# EAGLE board ENTRENADOR_SMD (EAGLE 9.6.2)
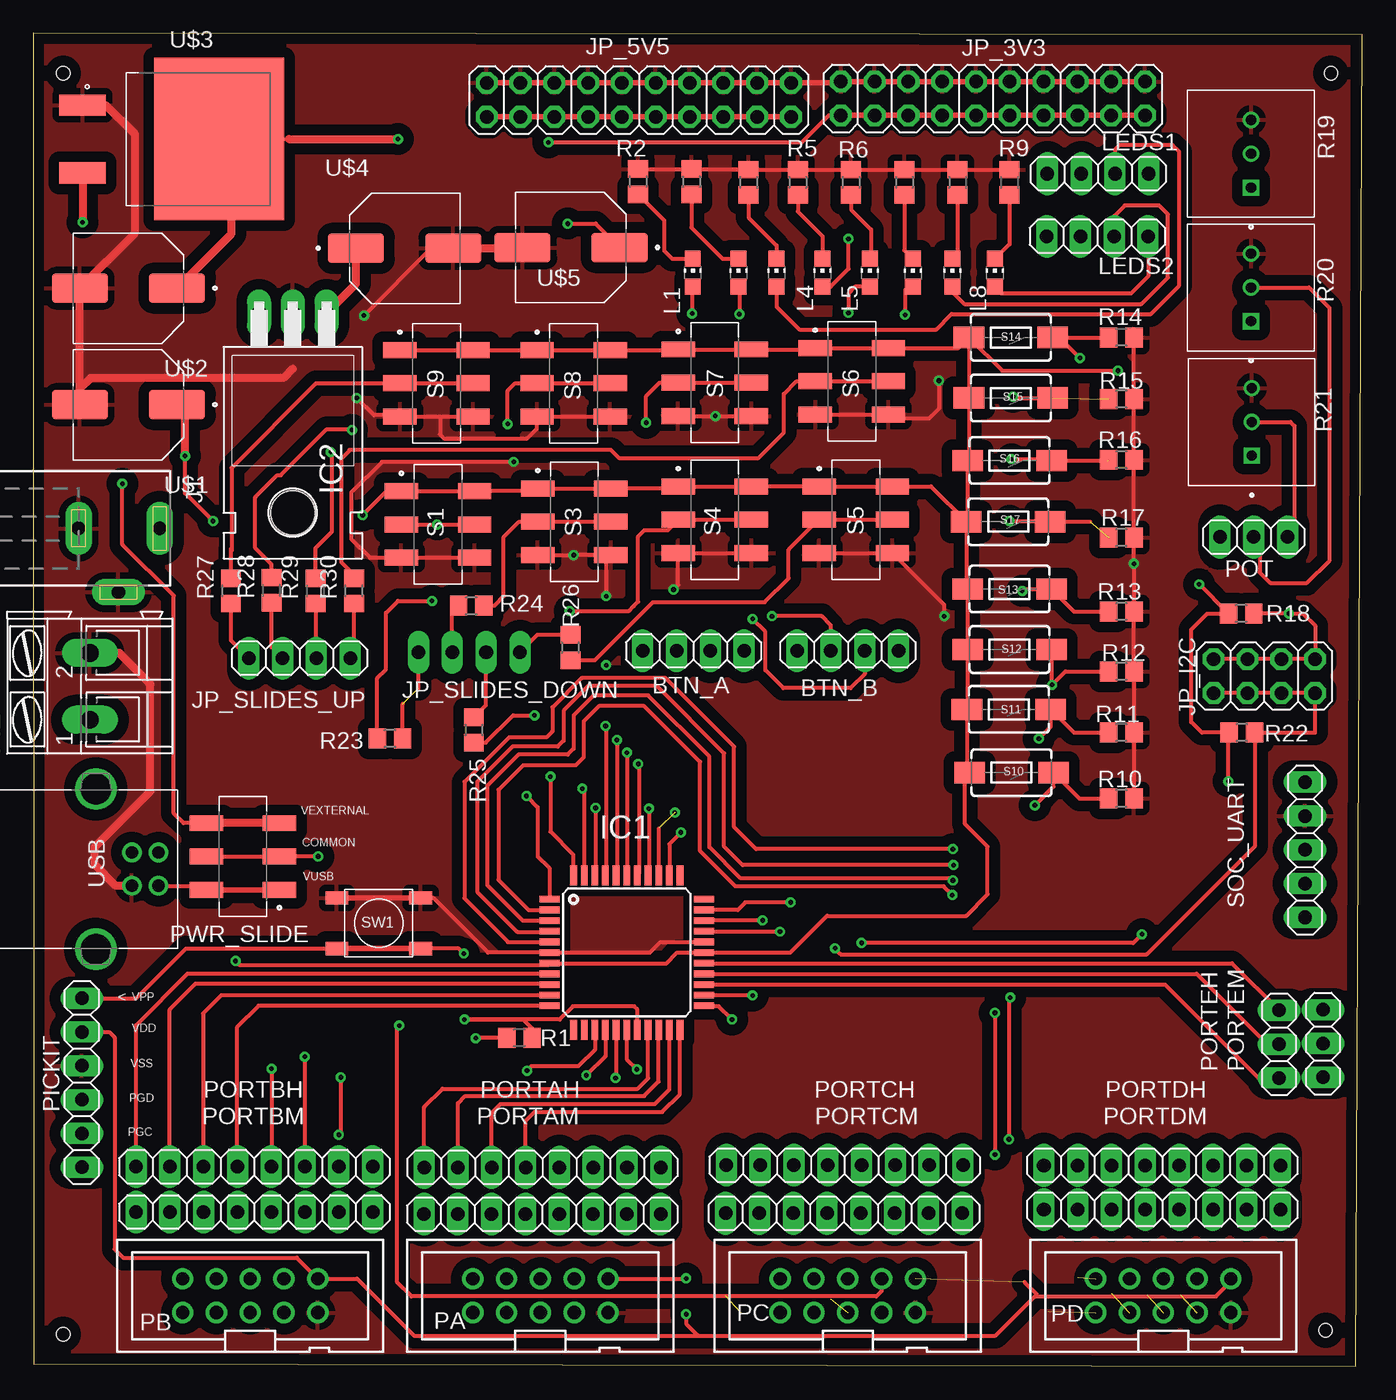
[diagram p0: board, top side]
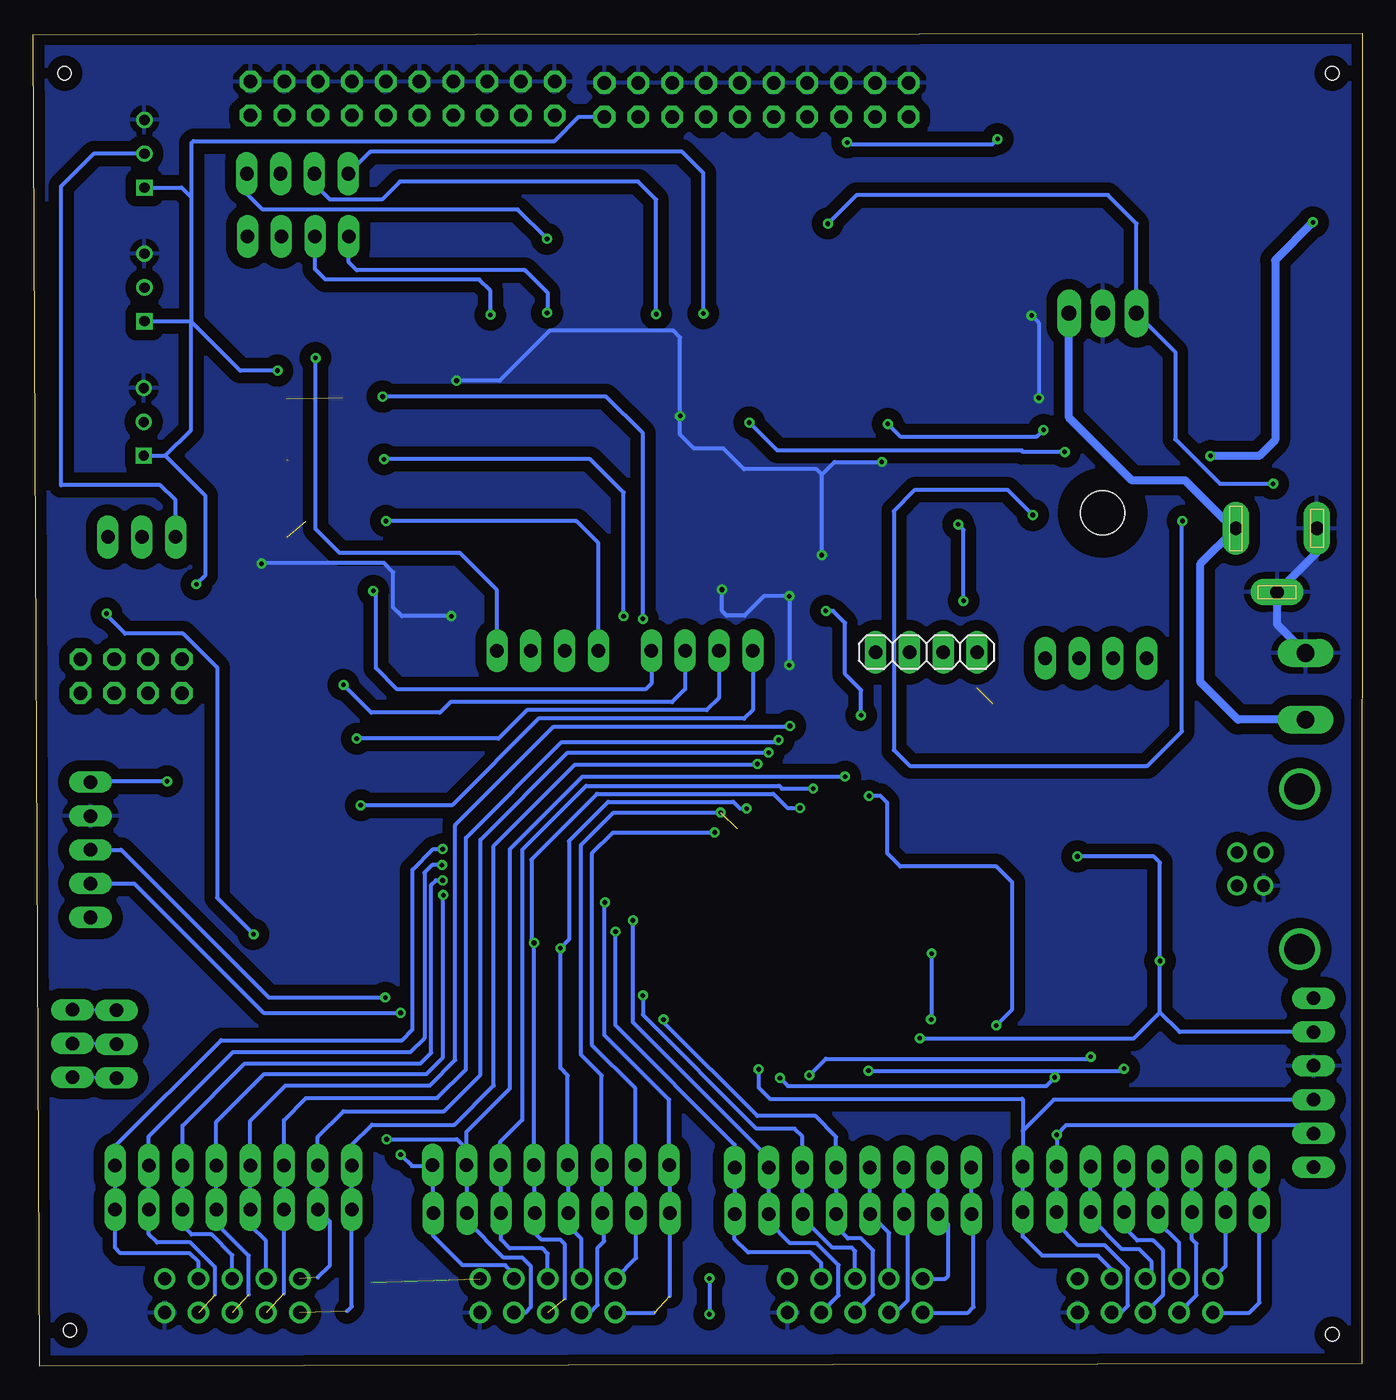
[diagram p1: board, bottom side, seen from below]

Size 99.85 x 100.15 mm. Coordinates in mm from the lower left corner, seen from the top.
Outline: 0.05,0.2 99.35,0 99.85,100.05 0,100.15 0.05,0.2
Copper layers (1*16): Top 0.035mm / dielectric 1.5mm / Bottom 0.035mm
Design rules "China_JLCPCB *": minimum track width 0.25mm, minimum drill 0.4mm, track to track 0.24mm, track to pad 0.23mm, pad to pad 0.2mm, via to via 0.25mm, smd to smd 0.2mm, copper to edge 0.5mm, drill to drill 0.3mm, minimum pad ring 0.149mm, minimum via ring 0.2mm, stop-mask expansion 3mil, vias tented up to drill 0.6mm, thermal gap 20mil
Holes 1 mm at 2.25,2.4 97.1,2.7 97.5,97.15 2.25,97.15

## Footprints (pad centres in the part's own frame; a part is rotated, then mirrored left to right if it is on the bottom)
1X04 = drill 1.016 long: 1 -3.81,0; 2 -1.27,0; 3 1.27,0; 4 3.81,0
TQFP44 = smd 1.5 x 0.5: 1 -5.8,4; 2 -5.8,3.2; 3 -5.8,2.4; 4 -5.8,1.6; 5 -5.8,0.8; 6 -5.8,0; 7 -5.8,-0.8; 8 -5.8,-1.6; 9 -5.8,-2.4; 10 -5.8,-3.2; 11 -5.8,-4; 23 5.8,-4; 24 5.8,-3.2; 25 5.8,-2.4; 26 5.8,-1.6; 27 5.8,-0.8; 28 5.8,0; 29 5.8,0.8; 30 5.8,1.6; 31 5.8,2.4; 32 5.8,3.2; 33 5.8,4 | smd 0.5 x 1.5: 12 -4,-5.8; 13 -3.2,-5.8; 14 -2.4,-5.8; 15 -1.6,-5.8; 16 -0.8,-5.8; 17 0,-5.8; 18 0.8,-5.8; 19 1.6,-5.8; 20 2.4,-5.8; 21 3.2,-5.8; 22 4,-5.8; 34 4,5.8; 35 3.2,5.8; 36 2.4,5.8; 37 1.6,5.8; 38 0.8,5.8; 39 0,5.8; 40 -0.8,5.8; 41 -1.6,5.8; 42 -2.4,5.8; 43 -3.2,5.8; 44 -4,5.8
TO220H = drill 1.118 long: 1 -2.54,-10.16; 2 0,-10.16; 3 2.54,-10.16 | hole 3.302: 0,4.826
DCJ0202 = drill 1 pad 2 long: 1 0,3.1; 2 4.8,0; 3 0,-3
2X10 = drill 1.016 octagon: 1 -11.43,-1.27; 2 -11.43,1.27; 3 -8.89,-1.27; 4 -8.89,1.27; 5 -6.35,-1.27; 6 -6.35,1.27; 7 -3.81,-1.27; 8 -3.81,1.27; 9 -1.27,-1.27; 10 -1.27,1.27; 11 1.27,-1.27; 12 1.27,1.27; 13 3.81,-1.27; 14 3.81,1.27; 15 6.35,-1.27; 16 6.35,1.27; 17 8.89,-1.27; 18 8.89,1.27; 19 11.43,-1.27; 20 11.43,1.27
2X04 = drill 1.016 octagon: 1 -3.81,-1.27; 2 -3.81,1.27; 3 -1.27,-1.27; 4 -1.27,1.27; 5 1.27,-1.27; 6 1.27,1.27; 7 3.81,-1.27; 8 3.81,1.27
CHIP-LED0805 = smd 1.2 x 1.2: A 0,-1.05; C 0,1.05
PAK100/2500-10 = drill 1 pad 1.422: 1 -5.08,-1.27; 2 -5.08,1.27; 3 -2.54,-1.27; 4 -2.54,1.27; 5 0,-1.27; 6 0,1.27; 7 2.54,-1.27; 8 2.54,1.27; 9 5.08,-1.27; 10 5.08,1.27
1X06 = drill 1.016 long: 1 -6.35,0; 2 -3.81,0; 3 -1.27,0; 4 1.27,0; 5 3.81,0; 6 6.35,0
1X08 = drill 1.016 long: 1 -8.89,0; 2 -6.35,0; 3 -3.81,0; 4 -1.27,0; 5 1.27,0; 6 3.81,0; 7 6.35,0; 8 8.89,0
1X03 = drill 1.016 long: 1 -2.54,0; 2 0,0; 3 2.54,0
SW_JS202011SCQN = smd 1.2 x 2.5: 1 -2.5,-2.75; 2 0,-2.75; 3 2.5,-2.75; 4 -2.5,2.75; 5 0,2.75; 6 2.5,2.75
R0805 = smd 1.3 x 1.5: 1 -0.95,0; 2 0.95,0
TRIM_COM-09806 = drill 0.76 square: 1 -2.54,0 | drill 0.76: 2 0,0; 3 2.54,0
TACTILE_SWITCH_SMD_6.0X3.5MM = smd 2.3 x 1.6: 1 -3.15,0; 2 3.15,0
1X05 = drill 1.016 long: 1 -5.08,0; 2 -2.54,0; 3 0,0; 4 2.54,0; 5 5.08,0
SW_TL3342F160QG/TR = smd 1.7 x 1: 1 -3.15,-1.9; 2 3.15,-1.9; 3 -3.15,1.9; 4 3.15,1.9
CAPA = smd 4.2 x 2.2: N 3.65,0; P -3.65,0
VREG3V3 = smd 3.5 x 1.6: 1 -6.7,2.54; 3 -6.7,-2.54 | smd 9.75 x 12.2: 4 3.575,0
85-32004-10X = drill 0.92 pad 1.27: 1 4.71,-1.25; 2 4.71,1.25; 3 2.71,1.25; 4 2.71,-1.25 | drill 2.3 pad 3: M1 0,6.02; M2 0,-6.02
AK300/2 = drill 1.321 long: 1 -2.515,0; 2 2.489,0

## Placement (x,y rotation side)
BTN_A  [1X04]  49.6,53.75 0 top
BTN_B  [1X04]  61.2,53.75 0 top
IC1  PIC16F1939PT  [TQFP44]  44.59,31.08 0 top
IC2  7824T  [TO220H]  19.5,68.95 180 top
J1  DCJ0202  [DCJ0202]  6.4,62.95 270 top
JP_3V3  [2X10]  72.1,95.25 0 top
JP_5V5  [2X10]  45.5,95.15 0 top
JP_I2C  [2X04]  92.5,51.85 180 top
JP_SLIDES_DOWN  [1X04]  32.75,53.65 0 bottom
JP_SLIDES_UP  [1X04]  20,53.2 0 top
L1  [CHIP-LED0805]  49.55,82.15 0 top
L4  [CHIP-LED0805]  59.3,82.15 0 top
L5  [CHIP-LED0805]  62.85,82.15 0 top
L8  [CHIP-LED0805]  72.25,82.15 0 top
LED2  [CHIP-LED0805]  53,82.15 0 top
LED3  [CHIP-LED0805]  55.85,82.15 0 top
LED6  [CHIP-LED0805]  66.1,82.15 0 top
LED7  [CHIP-LED0805]  69.05,82.15 0 top
LEDS1  [1X04]  80,89.6 0 top
LEDS2  [1X04]  79.95,84.9 0 top
PA  2510-  [PAK100/2500-10]  38.1,5.3 0 top
PB  2510-  [PAK100/2500-10]  16.3,5.3 0 top
PC  2510-  [PAK100/2500-10]  61.2,5.3 0 top
PD  2510-  [PAK100/2500-10]  84.9,5.3 0 top
PICKIT  [1X06]  3.65,21.3 270 top
PORTAH  [1X08]  38.26,14.94 0 top
PORTAM  [1X08]  38.24,11.42 0 top
PORTBH  [1X08]  16.61,14.99 0 top
PORTBM  [1X08]  16.61,11.58 0 top
PORTCH  [1X08]  60.96,15.1 0 top
PORTCM  [1X08]  60.91,11.49 0 top
PORTDH  [1X08]  84.82,15.09 0 top
PORTDM  [1X08]  84.82,11.78 0 top
PORTEH  [1X03]  93.6,24.2 90 top
PORTEM  [1X03]  96.9,24.25 90 top
POT  [1X03]  91.7,62.3 0 top
PWR_SLIDE  SLDS2  [SW_JS202011SCQN]  15.75,38.3 90 top
R1  4K7  [R0805]  36.52,24.67 180 top
R2  330R  [R0805]  45.45,89 270 top
R3  330R  [R0805]  49.45,89 270 top
R4  330R  [R0805]  53.75,88.95 270 top
R5  330R  [R0805]  57.45,88.95 270 top
R6  330R  [R0805]  61.45,88.95 270 top
R7  330R  [R0805]  65.45,88.95 270 top
R8  330R  [R0805]  69.45,88.95 270 top
R9  330R  [R0805]  73.35,88.95 270 top
R10  10K  [R0805]  81.75,42.65 180 top
R11  10K  [R0805]  81.75,47.6 180 top
R12  10K  [R0805]  81.75,52.2 180 top
R13  10K  [R0805]  81.75,56.7 180 top
R14  10K  [R0805]  81.75,77.3 180 top
R15  10K  [R0805]  81.75,72.65 180 top
R16  10K  [R0805]  81.75,68.1 180 top
R17  10K  [R0805]  81.75,62.25 180 top
R18  [R0805]  90.75,56.55 180 top
R19  COM-09806  [TRIM_COM-09806]  91.5,91.1 90 top
R20  COM-09806  [TRIM_COM-09806]  91.5,81.05 90 top
R21  COM-09806  [TRIM_COM-09806]  91.55,70.95 90 top
R22  [R0805]  90.8,47.6 180 top
R23  4K7  [R0805]  26.8,47.15 180 top
R24  4K7  [R0805]  32.9,57.15 0 top
R25  4K7  [R0805]  33.1,47.8 270 top
R26  4K7  [R0805]  40.35,54 270 top
R27  4K7  [R0805]  14.85,58.25 90 top
R28  4K7  [R0805]  17.9,58.3 90 top
R29  4K7  [R0805]  21.2,58.25 90 top
R30  4K7  [R0805]  24.1,58.25 90 top
S1  SLDS2  [SW_JS202011SCQN]  30.4,63.25 270 top
S3  SLDS2  [SW_JS202011SCQN]  40.65,63.45 270 top
S4  SLDS2  [SW_JS202011SCQN]  51.2,63.6 270 top
S5  SLDS2  [SW_JS202011SCQN]  61.8,63.6 270 top
S6  SLDS2  [SW_JS202011SCQN]  61.5,74 270 top
S7  SLDS2  [SW_JS202011SCQN]  51.2,73.9 270 top
S8  SLDS2  [SW_JS202011SCQN]  40.6,73.85 270 top
S9  SLDS2  [SW_JS202011SCQN]  30.3,73.85 270 top
S10  BTN1  [TACTILE_SWITCH_SMD_6.0X3.5MM]  73.5,44.6 180 top
S11  BTN1  [TACTILE_SWITCH_SMD_6.0X3.5MM]  73.3,49.35 180 top
S12  BTN1  [TACTILE_SWITCH_SMD_6.0X3.5MM]  73.35,53.85 180 top
S13  BTN1  [TACTILE_SWITCH_SMD_6.0X3.5MM]  73.35,58.4 180 top
S14  BTN1  [TACTILE_SWITCH_SMD_6.0X3.5MM]  73.45,77.3 180 top
S15  BTN1  [TACTILE_SWITCH_SMD_6.0X3.5MM]  73.45,72.75 180 top
S16  BTN1  [TACTILE_SWITCH_SMD_6.0X3.5MM]  73.35,68.05 180 top
S17  BTN1  [TACTILE_SWITCH_SMD_6.0X3.5MM]  73.25,63.45 180 top
SOC_UART  [1X05]  95.55,38.8 90 top
SW1  TL3342F160QG/TR  [SW_TL3342F160QG/TR]  25.95,33.28 180 top
U$1  CAPA  [CAPA]  7.15,72.25 180 top
U$2  CAPA  [CAPA]  7.15,81 180 top
U$3  VREG3V3  [VREG3V3]  10.4,92.2 0 top
U$4  CAPA  [CAPA]  27.9,84 0 top
U$5  CAPA  [CAPA]  40.4,84.05 180 top
USB  USB_B  [85-32004-10X]  4.7,37.35 0 top
X1  [AK300/2]  4.25,51.1 90 top

## Library data of the parts
BTN_A BTN_B JP_3V3 JP_5V5 JP_I2C JP_SLIDES_DOWN JP_SLIDES_UP LEDS1 LEDS2 PICKIT PORTAH PORTAM PORTBH PORTBM PORTCH PORTCM PORTDH PORTDM PORTEH PORTEM POT SOC_UART = pinhead
IC1 = microchip; MPN: PIC16F1939-I/PT; OC_FARNELL: 1755834; OC_NEWARK: 08R1959
IC2 = linear
J1 = con-jack; OC_FARNELL: unknown; OC_NEWARK: unknown
L1 L4 L5 L8 LED2 LED3 LED6 LED7 = led
PA PB PC PD = con-3m; MF: 3M; MPN: 2510-6002UB; OC_FARNELL: 9838244; OC_NEWARK: 46F4725
PWR_SLIDE S1 S3-S9 = JS202011SCQN; AVAILABILITY: In Stock; DESCRIPTION: Slide Switch DPDT Surface Mount; MF: C&K; MP: JS202011SCQN; PACKAGE: None; PRICE: None; PURCHASE-URL: https://pricing.snapeda.com/search?q=JS202011SCQN&ref=eda
R1-R18 R22-R30 = R0805_; SPICEPREFIX: R
R19-R21 = COM-09806; AVAILABILITY: In Stock; DESCRIPTION: 10 kOhms 0.5W, 1/2W PC Pins Through Hole Trimmer Potentiometer Cermet 1.0 Turn Top Adjustment; MF: SparkFun Electronics; MP: COM-09806; PACKAGE: DIP-3 SparkFun Electronics; PRICE: None; PURCHASE-URL: https://pricing.snapeda.com/search?q=COM-09806&ref=eda
S10-S17 = PTS636SM25FSMTRLFS; AVAILABILITY: In Stock; DESCRIPTION: Switch Tactile N.O. SPST Rectangular Button F-Lead 0.05A 12VDC 1.77N SMD T/R; MF: CK; MP: PTS636SM25FSMTRLFS; PACKAGE: None; PRICE: None
SW1 = TL3342F160QG_TR; AVAILABILITY: In Stock; DESCRIPTION: Tactile Switch SPST-NO Top Actuated Surface Mount; MF: E-Switch; MP: TL3342F160QG/TR; PACKAGE: None; PRICE: None; PURCHASE-URL: https://pricing.snapeda.com/search?q=TL3342F160QG/TR&ref=eda
U$1 U$2 U$4 U$5 = CAPAE830X1000N
U$3 = VREG_L7805ACD2T
USB = con-cypressindustries; OC_FARNELL: unknown; OC_NEWARK: unknown
X1 = con-ptr500; OC_FARNELL: unknown; OC_NEWARK: unknown

## Nets
3V3: JP_3V3.1 JP_3V3.3 JP_3V3.5 JP_3V3.7 JP_3V3.9 JP_3V3.11 JP_3V3.13 JP_3V3.15 JP_3V3.17 JP_3V3.19 U$2.P U$3.4
GND: IC1.6 IC1.29 IC2.2 J1.2 J1.3 JP_3V3.2 JP_3V3.4 JP_3V3.6 JP_3V3.8 JP_3V3.10 JP_3V3.12 JP_3V3.14 JP_3V3.16 JP_3V3.18 JP_3V3.20 JP_5V5.2 JP_5V5.4 JP_5V5.6 JP_5V5.8 JP_5V5.10 JP_5V5.12 JP_5V5.14 JP_5V5.16 JP_5V5.18 JP_5V5.20 PA.9 PB.9 PC.9 PD.9 PICKIT.3 R2.1 R3.1 R4.1 R5.1 R6.1 R7.1 R8.1 R9.1 R10.1 R11.1 R12.1 R13.1 R14.1 R15.1 R16.1 R17.1 R19.3 R20.3 R21.3 S1.3 S1.6 S3.3 S3.6 S4.3 S4.6 S5.3 S5.6 S6.3 S6.6 S7.3 S7.6 S8.3 S8.6 S9.3 S9.6 SOC_UART.4 SW1.1 SW1.2 U$1.N U$2.N U$3.1 U$4.N U$5.N USB.4 X1.2
LVP: PICKIT.6
MCLR: IC1.18 PICKIT.1 R1.1 SW1.3 SW1.4
N$1: R23.2 S1.2 S1.5
N$2: R24.2 S3.2 S3.5
N$3: R25.2 S4.2 S4.5
N$4: R26.2 S5.2 S5.5
N$5: R30.2 S6.2 S6.5
N$6: R29.2 S7.2 S7.5
N$7: R28.2 S8.2 S8.5
N$8: R27.2 S9.2 S9.5
N$9: L1.C R2.2
N$10: LED2.C R3.2
N$11: LED3.C R4.2
N$12: L4.C R5.2
N$13: L5.C R6.2
N$14: LED6.C R7.2
N$15: LED7.C R8.2
N$16: L8.C R9.2
N$17: L1.A LEDS1.1
N$18: LED2.A LEDS1.2
N$19: LED3.A LEDS1.3
N$20: L4.A LEDS1.4
N$21: L5.A LEDS2.1
N$22: LED6.A LEDS2.2
N$23: LED7.A LEDS2.3
N$24: L8.A LEDS2.4
N$25: BTN_A.1 R10.2 S10.1
N$26: BTN_A.2 R11.2 S11.1
N$27: BTN_A.3 R12.2 S12.1
N$28: BTN_A.4 R13.2 S13.1
N$29: BTN_B.4 R14.2 S14.1
N$30: BTN_B.3 R15.2 S15.1
N$31: BTN_B.2 R16.2 S16.1
N$32: BTN_B.1 R17.2 S17.1
N$33: POT.3 R21.2
N$34: POT.2 R20.2
N$35: POT.1 R19.2
N$36: IC2.1 J1.1 U$4.P X1.1
N$37: JP_SLIDES_UP.1 R27.1
N$38: JP_SLIDES_UP.2 R28.1
N$39: JP_SLIDES_UP.3 R29.1
N$40: JP_SLIDES_DOWN.1 R26.1
N$41: JP_SLIDES_DOWN.2 R25.1
N$42: JP_SLIDES_DOWN.3 R24.1
N$43: JP_SLIDES_DOWN.4 R23.1
N$44: JP_SLIDES_UP.4 R30.1
RA0: IC1.19 PA.1 PORTAH.1 PORTAM.1
RA1: IC1.20 PA.2 PORTAH.2 PORTAM.2
RA2: IC1.21 PA.3 PORTAH.3 PORTAM.3
RA3: IC1.22 PA.4 PORTAH.4 PORTAM.4
RA4: IC1.23 PA.5 PORTAH.5 PORTAM.5
RA5: IC1.24 PA.6 PORTAH.6 PORTAM.6
RA6: IC1.31 PA.7 PORTAH.7 PORTAM.7
RA7: IC1.30 PA.8 PORTAH.8 PORTAM.8
RB0: IC1.8 PB.1 PORTBH.1 PORTBM.1
RB1: IC1.9 PB.2 PORTBH.2 PORTBM.2
RB2: IC1.10 PB.3 PORTBH.3 PORTBM.3
RB3: IC1.11 PB.4 PORTBH.4 PORTBM.4
RB4: IC1.14 PB.5 PORTBH.5 PORTBM.5
RB5: IC1.15 PB.6 PORTBH.6 PORTBM.6
RB6: IC1.16 PB.7 PICKIT.5 PORTBH.7 PORTBM.7
RB7: IC1.17 PB.8 PICKIT.4 PORTBH.8 PORTBM.8
RC0: IC1.32 PC.1 PORTCH.1 PORTCM.1
RC1: IC1.35 PC.2 PORTCH.2 PORTCM.2
RC2: IC1.36 PC.3 PORTCH.3 PORTCM.3
RC3: IC1.37 JP_I2C.2 JP_I2C.4 JP_I2C.6 JP_I2C.8 PC.4 PORTCH.4 PORTCM.4 R22.1
RC4: IC1.42 JP_I2C.1 JP_I2C.3 JP_I2C.5 JP_I2C.7 PC.5 PORTCH.5 PORTCM.5 R18.1
RC5: IC1.43 PC.6 PORTCH.6 PORTCM.6
RC6: IC1.44 PC.7 PORTCH.7 PORTCM.7 SOC_UART.3
RC7: IC1.1 PC.8 PORTCH.8 PORTCM.8 SOC_UART.2
RD0: IC1.38 PD.1 PORTDH.1 PORTDM.1
RD1: IC1.39 PD.2 PORTDH.2 PORTDM.2
RD2: IC1.40 PD.3 PORTDH.3 PORTDM.3
RD3: IC1.41 PD.4 PORTDH.4 PORTDM.4
RD4: IC1.2 PD.5 PORTDH.5 PORTDM.5
RD5: IC1.3 PD.6 PORTDH.6 PORTDM.6
RD6: IC1.4 PD.7 PORTDH.7 PORTDM.7
RD7: IC1.5 PD.8 PORTDH.8 PORTDM.8
RE0: IC1.25 PORTEH.1 PORTEM.1
RE1: IC1.26 PORTEH.2 PORTEM.2
RE2: IC1.27 PORTEH.3 PORTEM.3
RST: SOC_UART.1
VCC: IC1.7 IC1.28 JP_5V5.1 JP_5V5.3 JP_5V5.5 JP_5V5.7 JP_5V5.9 JP_5V5.11 JP_5V5.13 JP_5V5.15 JP_5V5.17 JP_5V5.19 PA.10 PB.10 PC.10 PD.10 PICKIT.2 PWR_SLIDE.2 PWR_SLIDE.5 R1.2 R18.2 R19.1 R20.1 R21.1 R22.2 S1.1 S1.4 S3.1 S3.4 S4.1 S4.4 S5.1 S5.4 S6.1 S6.4 S7.1 S7.4 S8.1 S8.4 S9.1 S9.4 S10.2 S11.2 S12.2 S13.2 S14.2 S15.2 S16.2 S17.2 SOC_UART.5 U$1.P U$3.3
VEXT: IC2.3 PWR_SLIDE.3 PWR_SLIDE.6 U$5.P
VUSB: PWR_SLIDE.1 PWR_SLIDE.4 USB.1

## Tracks (layer width: path | path; a pad name or v marks a point on that pad's centre or on a via)
3V3  (via drill 0.35)
  Top 0.254: 15.8,92.2 19.2,92.2 | 15.9,92.1 15.8,92.2 | 15.8,92.2 U$3.4
  Top 0.3: v38.7,91.95 57.75,91.95 59.78,93.98 JP_3V3.1
  Top 0.406: JP_3V3.1 JP_3V3.3 | 63.6,93.98 JP_3V3.3 | JP_3V3.3 JP_3V3.5 JP_3V3.7 JP_3V3.9 JP_3V3.11 JP_3V3.13 JP_3V3.15 JP_3V3.17 JP_3V3.19
  Top 0.61: U$2.P 14.9,85.1 14.9,91.1 15.9,92.1 | 19.2,92.2 v27.4,92.2
  Bottom 0.3: v27.4,92.2 27.8,91.8 38.55,91.8 v38.7,91.95
GND  (via drill 0.35)
  Top 0.3: IC1.29 47.13,31.88 46.33,31.08 IC1.6 34.17,31.08 30.07,35.18 SW1.1 | R2.1 R3.1 53.7,89.95 R4.1 R5.1 R6.1 R7.1 R8.1 R9.1 | v24.3,72.75 25.6,71.45 27.45,71.45 S9.3 30.55,71.35 | v24.85,78.95 29.9,84 U$4.N | S1.6 S1.3 25.3,60.75 23.9,62.15 23.9,65.65 26.2,67.95 v36.1,67.95 | S5.3 S5.6 68.45,57.2 v68.45,56.35 | 30.55,71.35 S9.6 | 30.55,71.35 30.55,70 30.85,69.7 37.1,69.7 37.85,70.45 S8.3 S8.6 | S7.3 v51.25,71.4 S7.6 | S6.3 S6.6 64.55,71.2 67.3,71.2 68.05,71.95 v68.05,74.05 | S3.6 43.65,60.95 | 53.95,61.2 S4.6 S4.3 | R14.1 R15.1 R16.1 R17.1 v82.7,60.3 R13.1 R12.1 R11.1 R10.1 | 37.9,60.75 S3.3 v40.6,60.95 S3.6 | S3.6 43.05,60.6 v43.05,57.85 | S4.3 47.6,61.1 | v48.1,58.35 48.45,58.7 S4.3
  Top 0.406: SW1.1 SW1.2 | JP_3V3.20 JP_3V3.18 JP_3V3.16 JP_3V3.14 JP_3V3.12 JP_3V3.10 JP_3V3.8 JP_3V3.6 JP_3V3.4 JP_3V3.2 60.57,96.42 JP_5V5.20 JP_5V5.18 JP_5V5.16 JP_5V5.14 JP_5V5.12 JP_5V5.10 JP_5V5.8 JP_5V5.6 JP_5V5.4 JP_5V5.2
  Top 0.61: U$3.1 5.46,94.74 7.65,92.55 7.65,85.15 U$2.N U$1.N 3.5,73.45 4.3,74.25 18.8,74.25 19.5,74.95 | USB.4 6.2,36.1 4.6,37.7 4.6,39 8.8,43.2 8.8,51.25 6.46,53.59 X1.2 | U$4.N 36.7,84 U$5.N
  Bottom 0.3: v24.85,78.95 24.3,78.4 v24.3,72.75 | v68.45,56.35 72.15,56.35 72.8,57 72.8,59.65 73.5,60.35 82.65,60.35 v82.7,60.3 | v43.05,52.67 v43.05,57.85 44.95,57.85 46.4,56.4 47.75,56.4 48.1,56.75 v48.1,58.35 | v40.6,60.95 40.6,67 | v36.1,67.95 39.65,67.95 40.6,67 | 40.6,67 41,67.4 46.45,67.4 48,68.95 50.2,68.95 51.25,70 v51.25,71.4 51.25,77.3 51.75,77.8 61.05,77.8 64.8,74.05 v68.05,74.05
  Bottom 0.61: J1.3 3.4,61.15 J1.2 6.4,55.74 X1.2
  pour Top (isolate 0.813): 0.35,99.85 0.35,0.55 98.85,0.55 98.85,99.85
  pour Bottom (isolate 0.813): 0.3,100.1 0.3,0.3 99.1,0.3 99.1,100.1
MCLR  (via drill 0.35)
  Top 0.3: PICKIT.1 7.75,27.65 11.48,31.38 SW1.4 | IC1.18 45.39,26.81 45.15,27.05 40.55,27.05 39.55,26.05 v32.4,26.05 36.79,26.05 37.47,25.37 R1.1 | v32.35,31 31.97,31.38 SW1.3
  Top 0.406: SW1.4 SW1.3
  Bottom 0.3: v32.4,26.05 32.35,26.1 v32.35,31
N$1  (via drill 0.35)
  Top 0.3: S1.2 v30.35,63.25 S1.5 | R23.2 25.85,51.7 26.5,52.35 26.5,56.6 27.4,57.5 v29.95,57.5
  Bottom 0.3: v29.95,57.5 29.95,62.85 v30.35,63.25
N$2
  Top 0.3: S3.5 S3.2 36.5,63.45 35.35,62.3 35.35,57.85 34.65,57.15 R24.2
N$3  (via drill 0.35)
  Top 0.3: S4.5 S4.2 47.65,62.8 45.9,62.8 45.45,62.35 45.45,57.45 45.1,57.1 44.75,56.75 v40.3,56.75 | R25.2 34,46.85 36.05,48.9 v37.65,48.9
  Bottom 0.3: v37.65,48.9 37.65,50.8 38.85,52 38.85,55.85 39.75,56.75 v40.3,56.75
N$4
  Top 0.3: S5.5 S5.2 59,63.6 56.75,61.35 56.75,59.2 54.95,57.4 46.55,57.4 42.2,53.05 R26.2
N$5
  Top 0.3: S6.5 S6.2 57.35,74 56.4,73.05 56.4,70.15 54.5,68.25 44,68.25 43.4,68.85 23.8,68.85 | 23.8,68.85 23.75,68.85 | R30.2 24.1,59.45 23.15,60.4 23.15,68.2 23.8,68.85
N$6  (via drill 0.35)
  Top 0.3: S7.5 S7.2 47.05,73.9 46.05,72.9 v46.05,70.9 | R29.2 21.2,61.47 22.4,62.67 22.4,68.65 v22.35,68.7
  Bottom 0.3: v46.05,70.9 43.95,68.8 25.6,68.8 25.5,68.7 v22.35,68.7
N$7  (via drill 0.35)
  Top 0.3: v35.65,70.8 35.65,73.3 36.2,73.85 S8.2 S8.5 | R28.2 17.9,60.25 16.68,61.47 16.68,65.29 18.33,66.94 18.59,66.94 22.05,70.4 23.95,70.4 v23.95,70.35
  Bottom 0.3: v35.65,70.8 34.7,69.85 24.45,69.85 v23.95,70.35
N$8
  Top 0.3: 14.89,61.45 14.89,67.49 21.25,73.85 S9.2 S9.5 | 14.89,61.45 14.89,61.25 | R27.2 14.85,61.41 14.89,61.45
N$9
  Top 0.3: R2.2 47.4,86.1 47.4,83.8 48,83.2 L1.C
N$10
  Top 0.3: R3.2 49.45,85.55 51.8,83.2 LED2.C
N$11
  Top 0.3: R4.2 53.75,86.3 55.85,84.2 LED3.C
N$12
  Top 0.3: R5.2 57.45,86.75 59.3,84.9 L4.C
N$13
  Top 0.3: R6.2 61.45,86.9 62.95,85.4 62.95,83.3 L5.C
N$14
  Top 0.3: R7.2 65.45,83.85 LED6.C
N$15
  Top 0.3: R8.2 69.45,83.6 LED7.C
N$16
  Top 0.3: R9.2 73.35,84.3 L8.C
N$17  (via drill 0.35)
  Top 0.3: L1.A 49.5,81.05 v49.5,79.1
  Bottom 0.3: v49.5,79.1 49.5,89.65 51.1,91.25 74.54,91.25 LEDS1.1
N$18  (via drill 0.35)
  Top 0.3: LED2.A 53.05,81.05 v53.05,79.05
  Bottom 0.3: v53.05,79.05 53.05,87.65 54.4,89 72.3,89 73.65,87.65 77.55,87.65 78.73,88.83 LEDS1.2
N$19
  Top 0.3: LEDS1.3 81.27,91.42 81.6,91.75 85.6,91.75 86.1,91.25 86.1,81.2 83.95,79.05 69,79.05 67.85,77.9 57.55,77.9 55.85,79.6 LED3.A
N$20  (via drill 0.35)
  Top 0.3: L4.A 59.9,81.1 61.25,82.45 v61.25,84.7
  Bottom 0.3: v61.25,84.7 63.45,86.9 82.6,86.9 83.81,88.11 LEDS1.4
N$21  (via drill 0.35)
  Top 0.3: L5.A 61.75,81.1 61.25,80.6 v61.25,79.15
  Bottom 0.3: v61.25,79.15 61.2,79.2 61.2,80.65 62.9,82.35 75.55,82.35 76.14,82.94 LEDS2.1
N$22  (via drill 0.35)
  Top 0.3: LED6.A 66.05,81.05 65.7,81.05 65.5,80.85 v65.5,79
  Bottom 0.3: v65.5,79 65.5,80.8 66.35,81.65 77.9,81.65 78.68,82.43 LEDS2.2
N$23
  Top 0.3: LEDS2.3 81.22,86.42 82,87.2 84.6,87.2 85.25,86.55 85.25,81.8 83.25,79.8 69.95,79.8 69.05,80.7 LED7.A
N$24
  Top 0.3: L8.A 72.75,80.6 82.45,80.6 83.8,81.95 83.8,84.86 LEDS2.4
N$25  (via drill 0.35)
  Top 0.3: v75.25,42.15 76.65,43.55 S10.1 78.6,42.65 R10.2
  Bottom 0.3: BTN_A.1 45.79,49.31 46.45,48.65 61.9,48.65 68.4,42.15 v75.25,42.15
N$26  (via drill 0.35)
  Top 0.3: v75.55,47.15 76.45,48.05 S11.1 78.2,47.6 R11.2
  Bottom 0.3: BTN_A.2 48.33,50.22 49.25,49.3 62.75,49.3 64.9,47.15 v75.55,47.15
N$27  (via drill 0.35)
  Top 0.3: S12.1 76.55,53.8 v76.55,51.2 77.55,52.2 R12.2
  Bottom 0.3: BTN_A.3 50.87,50.88 51.85,49.9 68.5,49.9 69.3,49.1 74.45,49.1 v76.55,51.2
N$28  (via drill 0.35)
  Top 0.3: v74.3,58.25 74.45,58.4 S13.1 78.2,56.7 R13.2
  Bottom 0.3: BTN_A.4 53.41,51.29 53.85,50.85 72.5,50.85 74.1,52.45 74.1,58.05 v74.3,58.25
N$29  (via drill 0.35)
  Top 0.3: v78.65,75.75 77.1,77.3 S14.1 R14.2
  Bottom 0.3: BTN_B.4 65.01,58.31 67.8,61.1 76.85,61.1 78.65,62.9 v78.65,75.75
N$30  (via drill 0.35)  (1 unrouted)
  Top 0.3: BTN_B.3 62.47,52.02 61.4,50.95 56.35,50.95 55,52.3 55,55.2 v54.05,56.15 | v73.6,72.85 73.7,72.75 S15.1
  Bottom 0.3: v54.05,56.15 54.05,70.1 56.8,72.85 v73.6,72.85
N$31  (via drill 0.35)  (1 unrouted)
  Top 0.3: BTN_B.2 59.93,55.67 59.25,56.35 v55.5,56.35 | v73.5,68.15 76.4,68.15 S16.1 80.7,68.05
  Bottom 0.3: v55.5,56.35 55.5,65.65 58,68.15 v73.5,68.15
N$32  (via drill 0.35)  (1 unrouted)
  Top 0.3: v73.35,63.5 76.35,63.5 S17.1 79.4,63.45
  Bottom 0.3: BTN_B.1 57.39,61.84 59.05,63.5 v73.35,63.5 73.4,63.45
N$33
  Top 0.3: R21.2 94.45,70.95 94.75,70.65 94.75,62.81 POT.3
N$34
  Top 0.3: POT.2 92.15,61.85 92.15,59.65 92.95,58.85 95.7,58.85 97.4,60.55 97.4,79.5 95.95,80.95 95.85,81.05 R20.2
N$35
  Bottom 0.3: POT.1 89.16,65.06 90.3,66.2 97.75,66.2 97.75,88.65 95.3,91.1 R19.2
N$36
  Top 0.61: IC2.1 24.25,81.32 U$4.P
  Bottom 0.61: X1.1 9.34,48.59 12.15,51.4 12.15,60.3 J1.1 9.8,63.25 10,63.25 13.3,66.55 17.3,66.55 22.04,71.29 IC2.1
N$37
  Top 0.3: JP_SLIDES_UP.1 14.85,54.54 R27.1
N$38
  Top 0.3: JP_SLIDES_UP.2 17.9,54.03 R28.1
N$39
  Top 0.3: JP_SLIDES_UP.3 21.27,57.23 R29.1
N$40
  Top 0.3: R26.1 37.86,54.95 JP_SLIDES_DOWN.1
N$41
  Top 0.3: R25.1 34.02,49.67 JP_SLIDES_DOWN.2
N$42
  Top 0.3: JP_SLIDES_DOWN.3 31.48,56.68 R24.1
N$43  (1 unrouted)
  Top 0.3: R23.1 27.75,49.76 | 28.94,50.95 JP_SLIDES_DOWN.4
N$44
  Top 0.3: JP_SLIDES_UP.4 24.1,53.49 R30.1
RA0
  Top 0.3: PORTAH.1 29.37,19.47 30.75,20.85 45.4,20.85 46.19,21.64 IC1.19
  Bottom 0.3: PA.1 29.62,4.03 29.2,4.45 29.2,11.27 PORTAM.1 29.35,14.92 PORTAH.1
RA1
  Top 0.3: PORTAH.2 31.91,19.76 32.45,20.3 45.9,20.3 46.99,21.39 IC1.20
  Bottom 0.3: PA.2 31.33,6.57 31.1,6.8 31.1,10.63 PORTAM.2 31.89,14.92 PORTAH.2
RA2
  Top 0.3: PORTAH.3 34.45,19.05 35.1,19.7 46.7,19.7 47.79,20.79 IC1.21
  Bottom 0.3: PA.3 35.07,4.03 34.15,4.95 34.15,11.14 PORTAM.3 34.43,14.92 PORTAH.3
RA3
  Top 0.3: PORTAH.4 36.99,18.44 37.65,19.1 47.25,19.1 48.59,20.44 IC1.22
  Bottom 0.3: PA.4 35.56,10.01 PORTAM.4 36.97,14.92 PORTAH.4
RA4  (via drill 0.35)
  Top 0.3: IC1.23 50.42,27.05 51.5,27.05 v52.5,26.05
  Bottom 0.3: PA.5 36.75,5.38 36.75,8.7 37.65,9.6 38.65,9.6 39.51,10.46 PORTAM.5 39.51,14.92 PORTAH.5 39.53,17.23 41.1,18.8 45.45,18.8 52.5,25.85 v52.5,26.05
RA5  (via drill 0.35)
  Top 0.3: v54.05,27.85 54.05,27.88 IC1.24
  Bottom 0.3: PA.6 38.1,8.65 38.35,8.9 39.8,8.9 42.1,11.2 42.1,11.37 PORTAM.6 42.05,14.92 PORTAH.6 42.07,17.27 42.65,17.85 45.5,17.85 54.05,26.4 v54.05,27.85
RA6  (via drill 0.35)
  Top 0.3: v54.8,33.5 50.41,33.5 IC1.31
  Bottom 0.3: PA.7 39.35,5.32 39.35,7.6 41,9.25 43,9.25 44.59,10.84 PORTAM.7 44.59,14.92 PORTAH.7 44.61,15.66 54.8,25.85 v54.8,33.5
RA7  (via drill 0.35)
  Top 0.3: v56.1,32.65 50.42,32.65 IC1.30
  Bottom 0.3: PA.8 40.64,7.74 41.45,8.55 46.15,8.55 47.15,9.55 47.15,11.4 PORTAM.8 47.13,14.92 PORTAH.8 47.15,16.65 56.1,25.6 v56.1,32.65
RB0
  Top 0.3: PORTBH.1 7.72,25.62 11.6,29.5 38.77,29.5 IC1.8
  Bottom 0.3: PB.1 8.47,4.03 7.72,4.78 PORTBM.1 PORTBH.1
RB1
  Top 0.3: PORTBH.2 10.26,26.81 12.2,28.75 38.72,28.75 IC1.9
  Bottom 0.3: PB.2 10.26,7.53 PORTBM.2 PORTBH.2
RB2
  Top 0.3: IC1.10 14.13,27.88 12.75,26.5 12.75,15.04 PORTBH.3
  Bottom 0.3: PB.3 12.45,5.34 12.45,9.2 12.8,9.55 PORTBM.3 PORTBH.3
RB3
  Top 0.3: IC1.11 16.93,27.08 15.3,25.45 15.3,15.03 PORTBH.4
  Bottom 0.3: PB.4 13.76,9.26 15.34,10.84 PORTBM.4 PORTBH.4
RB4  (via drill 0.35)
  Top 0.3: IC1.14 42.19,23.78 40.94,22.53 37.43,22.53 v37.1,22.2 | v17.9,22.35 17.9,15.01 PORTBH.5
  Bottom 0.3: PB.5 14.95,5.38 14.95,8.7 15.7,9.45 16.9,9.45 17.88,10.43 PORTBM.5 PORTBH.5 | v37.1,22.2 18.05,22.2 v17.9,22.35
RB5  (via drill 0.35)
  Top 0.3: IC1.15 42.99,23.29 v41.55,21.85 | v20.4,23.25 20.4,15.01 PORTBH.6
  Bottom 0.3: PB.6 15.85,7.02 15.85,7.9 16.75,8.8 18.05,8.8 20.42,11.17 PORTBM.6 PORTBH.6 | v41.55,21.85 40.3,23.1 20.55,23.1 v20.4,23.25
RB6  (via drill 0.35)
  Top 0.3: IC1.16 43.79,21.69 v43.75,21.65 | v23.1,21.7 23.1,17.53 v22.96,17.39
  Bottom 0.3: PB.7 18.12,4.03 17.6,4.55 17.6,7.35 19.35,9.1 21.35,9.1 22.96,10.71 PORTBM.7 PORTBH.7 v22.96,17.39 22.25,18.1 4.26,18.1 PICKIT.5 | v43.75,21.65 43.15,21.05 23.75,21.05 v23.1,21.7 23,21.7
RB7  (via drill 0.35)
  Top 0.3: IC1.17 44.59,23.06 v45.35,22.3
  Bottom 0.3: PB.8 18.84,7.29 19.85,8.3 24.05,8.3 25.5,9.75 PORTBM.8 PORTBH.8 25.5,17.7 | PICKIT.4 23.17,20.03 25.5,17.7 | v45.35,22.3 45.35,20.95 44.5,20.1 25.55,20.1 25.5,20.05 25.5,17.7
RC0  (via drill 0.35)  (1 unrouted)
  Top 0.3: v56.9,34.85 53.51,34.85 52.94,34.28 IC1.32
  Bottom 0.3: PC.1 53.17,4.03 | 52.02,5.28 PORTCM.1 52.02,15.05 PORTCH.1 52.07,20.02 56.95,24.9 56.95,34.8 v56.9,34.85
RC1  (via drill 0.35)
  Top 0.3: v48.65,40.1 47.79,39.24 IC1.35
  Bottom 0.3: PC.2 54.55,8.14 PORTCM.2 54.56,15.05 PORTCH.2 54.61,20.86 57.85,24.1 57.85,38.55 56.3,40.1 v48.65,40.1
RC2  (via drill 0.35)  (1 unrouted)
  Top 0.3: 46.99,40.39 IC1.36
  Bottom 0.3: PC.3 58.02,4.03 57.45,4.6 57.45,8.9 56.95,9.4 56.95,11.34 PORTCM.3 57.1,15.05 PORTCH.3 57.15,21.85 58.7,23.4 58.7,39.15 56.25,41.6 v48.2,41.6
RC3  (via drill 0.35)
  Top 0.3: v46.25,41.9 46.25,36.94 IC1.37 | 91.7,47.65 R22.1 91.8,47.6 | JP_I2C.8 JP_I2C.6 JP_I2C.4 JP_I2C.2 96.31,47.6 91.8,47.6 | v60.25,31.4 60.25,31.35 60.65,30.95 83.65,30.95 91.8,39.1 91.8,47.6
  Bottom 0.3: PC.4 58.66,9.56 59.64,10.54 PORTCM.4 59.64,15.05 PORTCH.4 59.69,21.84 60.25,22.4 v60.25,31.4 59.6,32.05 59.6,39.45 56.65,42.4 47.25,42.4 46.75,41.9 v46.25,41.9
RC4  (via drill 0.35)  (1 unrouted)
  Top 0.3: v42.25,41.95 42.25,36.94 IC1.42 | JP_I2C.7 JP_I2C.5 JP_I2C.3 JP_I2C.1 96.31,55.64 95.4,56.55 v94.35,56.55 R18.1 | v83.3,32.45 82.65,31.8 v62.23,31.8
  Bottom 0.3: 59.9,5.08 59.9,9.15 60.25,9.5 61.65,9.5 62.18,10.03 PORTCM.5 62.18,15.05 PORTCH.5 v62.23,31.8 62.43,32 62.43,38.07 57.5,43 44.25,43 43.2,41.95 v42.25,41.95 | v83.3,32.45 86.05,35.2 86.05,52.5 88.6,55.05 92.95,55.05 94.35,56.45 v94.35,56.55
RC5  (via drill 0.35)
  Top 0.3: v41.25,43.4 41.4,43.25 IC1.43
  Bottom 0.3: PC.6 61.2,8.45 61.6,8.85 64.05,8.85 64.72,9.52 PORTCM.6 64.72,15.05 PORTCH.6 64.77,16.85 63.12,18.5 63.12,38.78 58.3,43.6 43.8,43.6 43.6,43.4 v41.25,43.4
RC6  (via drill 0.35)
  Top 0.3: v38.85,44.3 38.85,40.17 40.59,38.43 IC1.44 | v73.4,27.7 73.3,27.6 v73.3,17.05
  Bottom 0.3: PC.7 62.87,4.03 62.45,4.45 62.45,7.5 63.1,8.15 64.5,8.15 67.26,10.91 PORTCM.7 67.26,15.05 PORTCH.7 67.31,16.35 | 67.31,16.35 67.31,17.6 64.06,20.85 64.06,38.84 58.6,44.3 v38.85,44.3 | SOC_UART.3 93.25,38.8 82.15,27.7 v73.4,27.7 | v73.3,17.05 68.01,17.05 67.31,16.35
RC7  (via drill 0.35)
  Top 0.3: PC.8 63.74,5.64 63.34,5.24 28.41,5.24 27.35,6.3 27.35,25.45 v27.5,25.6 | v37.05,42.85 37.9,42 37.9,38.32 38.79,37.43 IC1.1 | v72.25,26.55 v72.25,15.9
  Bottom 0.3: PC.8 63.74,6.94 64.4,7.6 67.6,7.6 69.8,9.8 PORTCM.8 69.8,15.05 | 69.8,15.05 PORTCH.8 | v27.5,25.6 26.3,26.8 26.3,36.35 27.5,37.55 34.7,37.55 35.7,38.55 35.7,42.35 36.2,42.85 v37.05,42.85 | SOC_UART.2 92.26,36.26 82.55,26.55 v72.25,26.55 | v72.25,15.9 71.4,15.05 69.8,15.05
RD0  (via drill 0.35)  (1 unrouted)
  Top 0.3: v45.45,45.25 45.5,45.2 45.5,36.99 IC1.38
  Bottom 0.3: 76.27,4.13 75.93,4.47 PORTDM.1 PORTDH.1 75.93,16.62 74.4,18.15 68.2,18.15 65.25,21.1 65.25,39.1 59.15,45.2 45.5,45.2 v45.45,45.25
RD1  (via drill 0.35)  (1 unrouted)
  Top 0.3: v44.6,46.1 IC1.39
  Bottom 0.3: 78.48,6.67 77.55,7.6 77.55,10.86 PORTDM.2 PORTDH.2 78.47,17.23 76.55,19.15 69,19.15 66.25,21.9 66.25,39.55 59.7,46.1 v44.6,46.1
RD2  (via drill 0.35)  (1 unrouted)
  Top 0.3: v43.85,47.05 43.85,36.94 IC1.40
  Bottom 0.3: 81.01,5.48 PORTDM.3 PORTDH.3 81.01,18.49 79.35,20.15 69.5,20.15 67.35,22.3 67.35,39.7 60.15,46.9 44,46.9 v43.85,47.05
RD3  (via drill 0.35)
  Top 0.3: v43,48.1 43.05,48.05 43.05,36.94 IC1.41
  Bottom 0.3: PD.4 82.36,9.41 83.55,10.6 PORTDM.4 PORTDH.4 83.55,18.45 80.9,21.1 70.05,21.1 68.15,23 68.15,40.65 60.75,48.05 43.05,48.05 v43,48.1
RD4  (via drill 0.35)  (1 unrouted)
  Top 0.3: v69.05,35.4 68.4,36.05 52.75,36.05 50.1,38.7 50.1,45.4 45.9,49.6 42.5,49.6 41.35,48.45 41.35,45.75 40.75,45.15 36.8,45.15 34.95,43.3 34.95,36.55 37.22,34.28 IC1.2
  Bottom 0.3: 83.65,5.38 83.65,8.3 86.09,10.74 PORTDM.5 PORTDH.5 86.09,18.36 82.5,21.95 70.3,21.95 69.1,23.15 69.1,35.35 v69.05,35.4
RD5  (via drill 0.35)
  Top 0.3: v69.1,36.5 68.95,36.65 53.15,36.65 50.8,39 50.8,45.8 46.2,50.4 42.1,50.4 40.6,48.9 40.6,46.4 40.15,45.95 36.45,45.95 34.1,43.6 34.1,36.15 36.77,33.48 IC1.3
  Bottom 0.3: PD.6 84.9,8.35 86.45,9.9 87.95,9.9 88.63,10.58 PORTDM.6 PORTDH.6 88.63,18.07 83.95,22.75 70.75,22.75 69.95,23.55 69.95,36.15 69.6,36.5 v69.1,36.5
RD6  (via drill 0.35)  (1 unrouted)
  Top 0.3: v69.15,37.65 53.3,37.65 51.9,39.05 51.9,46.05 46.85,51.1 41.7,51.1 39.85,49.25 39.85,47 39.4,46.55 36,46.55 33.35,43.9 33.35,35.65 36.35,32.65 38.76,32.65 IC1.4
  Bottom 0.3: 86.2,5.37 86.2,7.45 88.05,9.3 90.55,9.3 91.17,9.92 PORTDM.7 PORTDH.7 91.17,17.28 84.85,23.6 71.5,23.6 70.45,24.65 70.45,37.1 69.9,37.65 v69.15,37.65
RD7  (via drill 0.35)
  Top 0.3: v69.1,38.85 54.3,38.85 52.65,40.5 52.65,46.55 47.5,51.7 41.2,51.7 39,49.5 39,47.7 38.55,47.25 35.75,47.25 32.4,43.9 32.4,35.15 35.67,31.88 IC1.5
  Bottom 0.3: PD.8 87.44,7.84 88.1,8.5 93.3,8.5 93.71,8.91 PORTDM.8 PORTDH.8 93.71,16.54 85.75,24.5 72.15,24.5 71.35,25.3 71.35,37.3 69.8,38.85 v69.1,38.85
RE0
  Top 0.3: IC1.25 85.02,28.68 92.05,21.65 PORTEH.1
  Bottom 0.2: PORTEM.1 93.65,21.71 PORTEH.1
RE1
  Top 0.3: IC1.26 87.42,29.48 92.7,24.2 PORTEH.2
  Bottom 0.2: PORTEM.2 93.65,24.25 PORTEH.2
RE2
  Top 0.3: IC1.27 90.06,30.28 PORTEH.3
  Bottom 0.2: PORTEM.3 93.65,26.79 PORTEH.3
VCC  (via drill 0.35)  (1 unrouted)
  Top 0.3: PWR_SLIDE.5 PWR_SLIDE.2 v21.4,38.3 | v15.2,30.45 15.52,30.13 38.64,30.13 IC1.7 47.58,30.28 48.38,31.08 IC1.28 56.88,31.08 59.65,33.85 70.1,33.85 71.7,35.45 71.7,39.05 70,40.75 70,44.65 70.15,44.8 | R1.2 33.27,24.67 v33.25,24.65 | 75.25,5.25 88.85,5.25 89.98,6.38 PD.10 | 49.95,2.3 28.6,2.3 24.33,6.57 PB.10 19.8,8.15 6.75,8.15 6.1,8.8 6.1,24.7 5.69,25.11 PICKIT.2 | 49.95,2.3 72.3,2.3 75.25,5.25 | 75.25,5.25 75.4,5.4 74.48,6.32 | PA.10 49.02,6.57 v49.05,6.6 | v49.05,3.9 49.05,3.2 49.95,2.3 | 89.8,47.65 R22.2 | S9.1 S9.4 S8.1 S8.4 48.4,76.35 S7.1 S7.4 58.65,76.4 S6.1 S6.4 69.5,76.5 S14.2 | 70.25,58.35 S13.2 | v89.8,43.95 89.8,47.55 R22.2 | R22.2 87.8,47.6 87,48.4 87,55.35 88.2,56.55 R18.2 v87.6,58.75 | S14.2 S15.2 70.3,68.15 S16.2 70.2,63.55 S17.2 | S17.2 67.45,66.1 S5.4 S5.1 S4.4 S4.1 48.3,65.95 S3.4 S3.1 37.7,65.75 S1.4 S1.1 26.55,65.75 v24.75,63.95 | S17.2 70.1,58.5 S13.2 | S13.2 S12.2 70.2,49.4 S11.2 70.15,44.8 | 70.15,44.8 S10.2 | v13.5,63.5 11.4,65.6 v11.4,68.4 | S14.2 72.8,74.8 v81.5,74.8
  Top 0.406: JP_5V5.1 JP_5V5.3 JP_5V5.5 JP_5V5.7 JP_5V5.9 JP_5V5.11 JP_5V5.13 JP_5V5.15 JP_5V5.17 JP_5V5.19
  Top 0.61: U$3.3 v3.7,85.95 | v11.4,68.4 11.4,71.65 U$1.P
  Bottom 0.3: v33.25,24.65 17.15,24.65 15.2,26.6 | 15.2,26.6 v15.2,30.45 15.2,37.85 15.65,38.3 v21.4,38.3 | PICKIT.2 13.71,25.11 15.2,26.6 | v49.05,6.6 v49.05,3.9 | v89.8,43.95 95.48,43.95 SOC_UART.5 | v24.75,63.95 26.65,65.85 33.6,65.85 35.2,64.25 35.2,46.3 34,45.1 16.15,45.1 13.55,47.7 13.55,63.5 v13.5,63.5 | v81.5,74.8 84.3,74.8 88,78.5 | R20.1 88.01,78.51 | 88.01,78.51 87.95,78.57 87.95,87.8 | 87.95,87.8 87.95,91.9 87.8,92.05 60.7,92.05 58.87,93.88 JP_5V5.19 | R21.1 89.94,68.41 | 89.94,68.41 88,70.35 88,78.5 | 88,78.5 88.01,78.51 | R19.1 88.71,88.56 87.95,87.8 | v87.6,58.75 86.95,59.4 86.95,65.42 89.94,68.41
  Bottom 0.61: v3.7,85.95 6.55,83.1 6.55,69.6 7.75,68.4 v11.4,68.4
VEXT  (via drill 0.35)
  Top 0.3: PWR_SLIDE.6 11.3,40.8 10.55,41.55 10.55,57.9 6.7,61.75 v6.7,66.3 | v40.15,85.85 42.25,85.85 U$5.P
  Top 0.61: PWR_SLIDE.3 PWR_SLIDE.6
  Bottom 0.3: v40.15,85.85 38,88 19.1,88 16.96,85.86 IC2.3 14.05,76.2 14.05,69.65 10.7,66.3 v6.7,66.3
VUSB
  Top 0.3: USB.1 12.7,36.1 PWR_SLIDE.4
  Top 0.406: PWR_SLIDE.1 PWR_SLIDE.4

## Text on the board
tNames: VEXTERNAL | COMMON | VUSB | < | VPP | VDD | VSS | PGD | PGC